# EAGLE board xv11_lidar_controller (EAGLE 6.2)
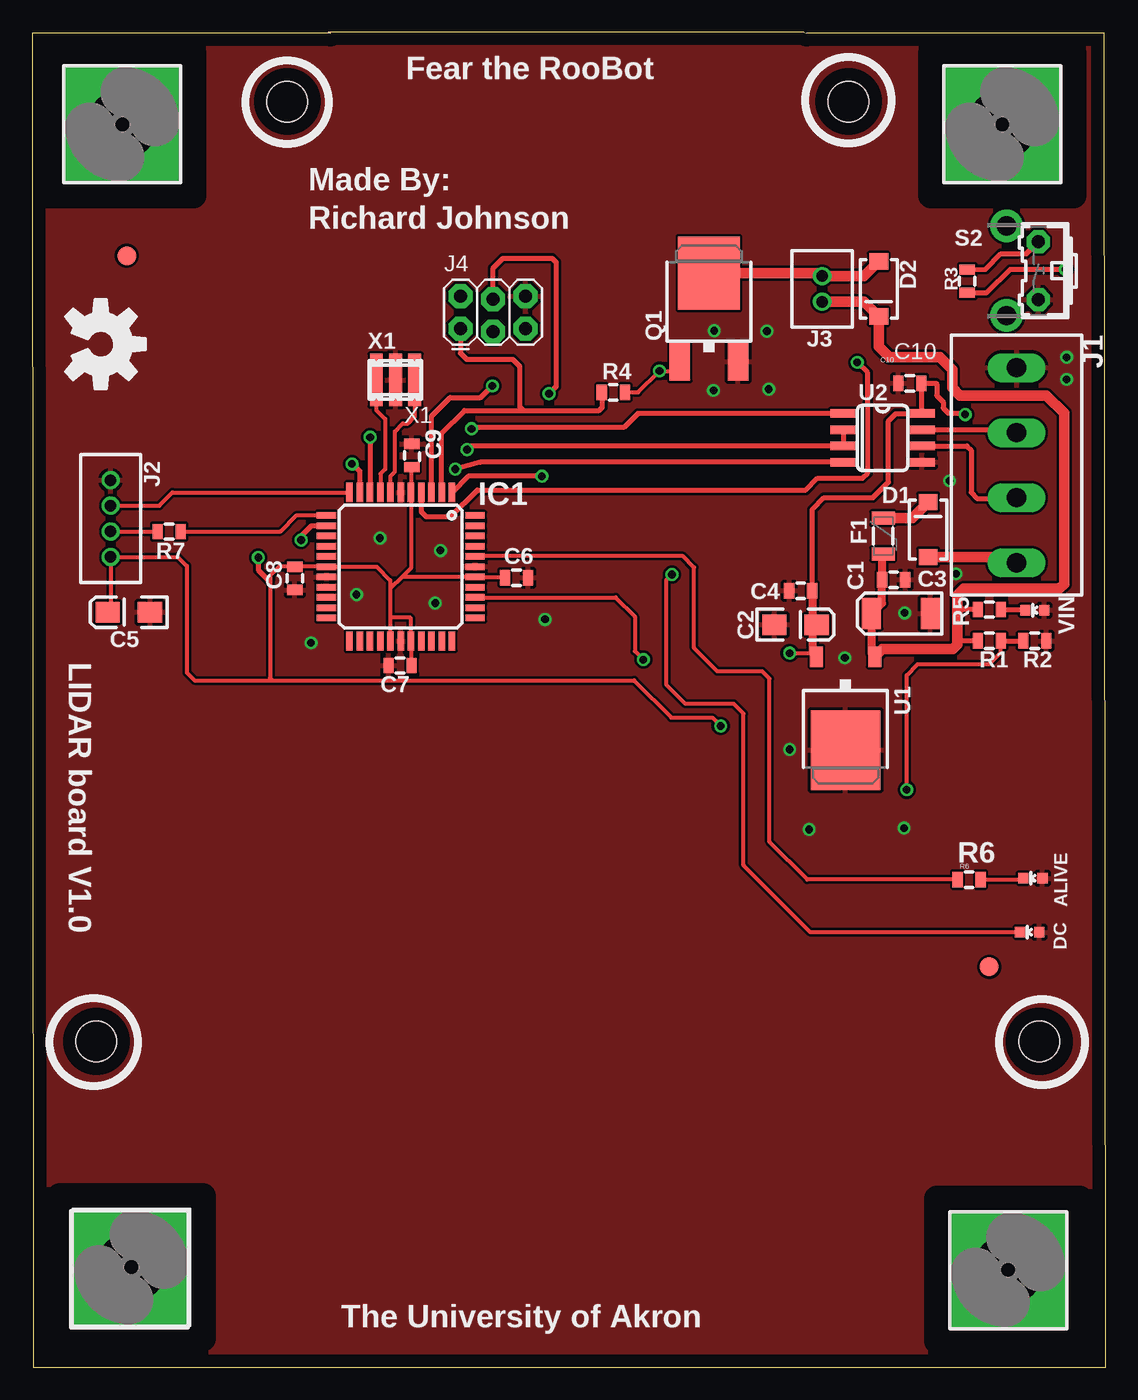
[diagram p0: board, top side]
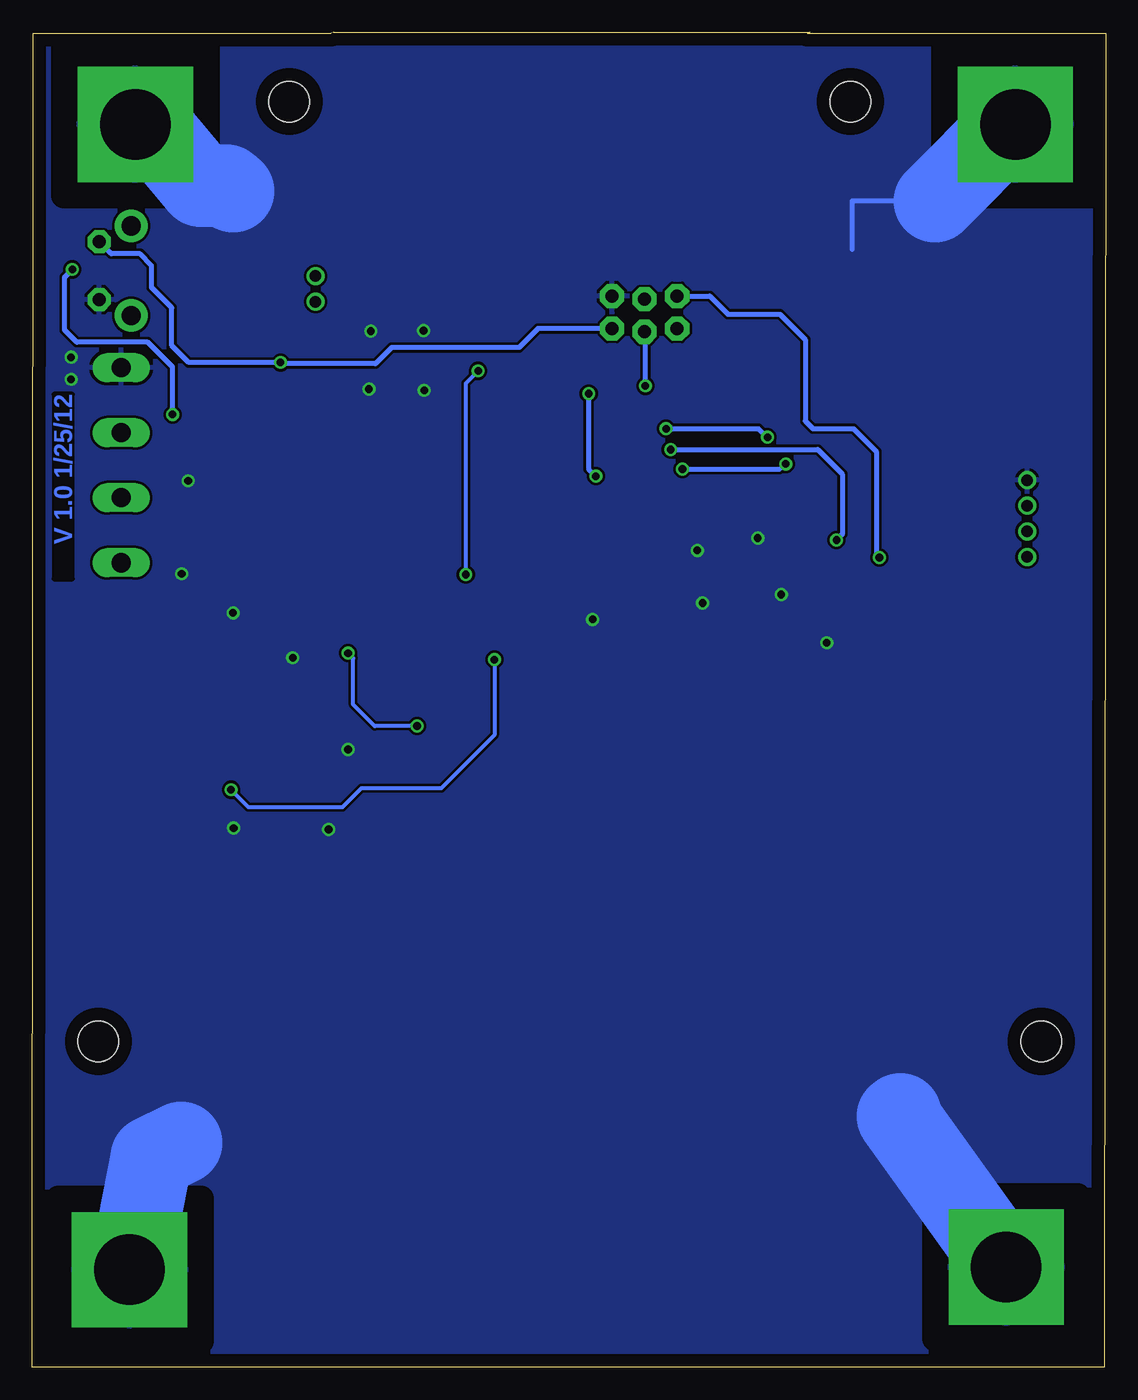
[diagram p1: board, bottom side, seen from below]

Size 83.87 x 104.31 mm. Coordinates in mm from the lower left corner, seen from the top.
Outline: 0.1,0 83.87,0 83.76,104.2 60.5,104.2 60.29,104.31 23.11,104.31 23.31,104.2 0,104.2 0.1,0
Copper layers (1+16): Top 0.035mm / dielectric 1.5mm / Bottom 0.035mm
Design rules: minimum track width 8mil, minimum drill 15mil, track to track 8mil, track to pad 8mil, pad to pad 8mil, via to via 8mil, smd to smd 8mil, copper to edge 40mil, drill to drill 8mil, minimum pad ring 10mil, minimum via ring 8mil, stop-mask expansion 4mil, vias tented up to drill 0mil, thermal gap 10mil
Holes 3.17 mm at 5.02,25.46 78.68,25.46 19.94,98.87 63.77,98.87

## Footprints (pad centres in the part's own frame; a part is rotated, then mirrored left to right if it is on the bottom)
EIA6032 = smd 1.5 x 2.4: P$1 -2.3,0; P$2 2.3,0
EIA3216-KIT = smd 1.9 x 1.6: A 1.65,0; C -1.65,0
0805 = smd 0.8 x 1.2: 1 -0.9,0; 2 0.9,0
SMA-DIODE = smd 1.27 x 1.47: A -2.15,0; C 2.15,0
PTC-1206 = smd 1 x 1.8: 1 -1.4,0; 2 1.4,0
5,5-PAD-SQUARE = drill 5.5 pad 9 square: B5,5 0,0
TQFP44 = smd 1.5 x 0.5: 1 -5.8,4; 2 -5.8,3.2; 3 -5.8,2.4; 4 -5.8,1.6; 5 -5.8,0.8; 6 -5.8,0; 7 -5.8,-0.8; 8 -5.8,-1.6; 9 -5.8,-2.4; 10 -5.8,-3.2; 11 -5.8,-4; 23 5.8,-4; 24 5.8,-3.2; 25 5.8,-2.4; 26 5.8,-1.6; 27 5.8,-0.8; 28 5.8,0; 29 5.8,0.8; 30 5.8,1.6; 31 5.8,2.4; 32 5.8,3.2; 33 5.8,4 | smd 0.5 x 1.5: 12 -4,-5.8; 13 -3.2,-5.8; 14 -2.4,-5.8; 15 -1.6,-5.8; 16 -0.8,-5.8; 17 0,-5.8; 18 0.8,-5.8; 19 1.6,-5.8; 20 2.4,-5.8; 21 3.2,-5.8; 22 4,-5.8; 34 4,5.8; 35 3.2,5.8; 36 2.4,5.8; 37 1.6,5.8; 38 0.8,5.8; 39 0,5.8; 40 -0.8,5.8; 41 -1.6,5.8; 42 -2.4,5.8; 43 -3.2,5.8; 44 -4,5.8
M4 = drill 1.5 long: P$1 0,0; P$2 5.08,0; P$3 10.16,0; P$4 15.24,0
2MM4POS = drill 0.9: 1 3,0; 2 1,0; 3 -1,0; 4 -3,0
2MM2POS = drill 0.9: P$1 -1,0; P$2 1,0
2X3_LOCK = drill 1.016 pad 1.88 octagon: 1 0,0; 2 0,2.54; 3 2.54,-0.254; 4 2.54,2.286; 5 5.08,0; 6 5.08,2.54
FIDUCIAL-1.5X3 = smd 1.5 x 1.5: 1 0,0
LED-0603 = smd 0.8 x 0.8: A 0,-0.75; C 0,0.75
DPAK = smd 1.6 x 3: 1 -2.28,-5.31; 3 2.28,-5.31 | smd 4.826 x 5.715: 4 0,1.588
B3F-31XX = drill 1.016 pad 1.778 octagon: 1 -2.261,-1.245; 2 2.261,-1.245 | drill 1.499 pad 2.54: 3 -3.505,1.245; 4 3.505,1.245
TO252 = smd 1 x 1.6: 1 -2.28,-4.8; 2 2.28,-4.8 | smd 5.4 x 6.2: 3 0,2.5
SO08 = smd 0.66 x 2.032: 1 -1.905,-3.073; 2 -0.635,-3.073; 3 0.635,-3.073; 4 1.905,-3.073; 5 1.905,3.073; 6 0.635,3.073; 7 -0.635,3.073; 8 -1.905,3.073
AWCSR = smd 1 x 4.1: 1 -1.5,0; 2 0,0; 3 1.5,0

## Placement (x,y rotation side)
C1  10uF  [EIA6032]  67.86,58.89 0 top
C2  10uF  [EIA3216-KIT]  59.63,58.03 0 top
C3  .1uF  [0805]  67.31,61.53 0 top
C4  .1uF  [0805]  60.04,60.67 180 top
C5  10uF  [EIA3216-KIT]  7.56,58.99 180 top
C6  .1uF  [0805]  37.84,61.68 0 top
C7  .1uF  [0805]  28.75,54.83 180 top
C8  .1uF  [0805]  20.52,61.63 270 top
C9  .1uF  [0805]  29.66,71.23 90 top
C10  .1uF  [0805]  68.58,76.87 180 top
D1  [SMA-DIODE]  70,65.44 90 top
D2  [SMA-DIODE]  66.14,84.24 270 top
F1  PTCSMD  [PTC-1206]  66.49,64.94 270 top
H1  [5,5-PAD-SQUARE]  7.06,97.09 0 top
H2  [5,5-PAD-SQUARE]  75.79,97.09 0 top
H3  [5,5-PAD-SQUARE]  7.77,7.84 0 top
H4  [5,5-PAD-SQUARE]  76.25,7.63 0 top
IC1  ATMEGA644A  [TQFP44]  28.8,62.55 270 top
J1  EUROMAG-4  [M4]  76.91,78.09 270 top
J2  LIDAR4POS  [2MM4POS]  6.14,66.31 270 top
J3  LIDAR2POS  [2MM2POS]  61.72,84.24 90 top
J4  AVR_SPI_PRG_62X3_LOCK  [2X3_LOCK]  33.47,81.14 0 top
JP1  FIDUCIAL1.5X3  [FIDUCIAL-1.5X3]  7.41,86.83 0 top
JP2  FIDUCIAL1.5X3  [FIDUCIAL-1.5X3]  74.77,31.31 0 top
LED1  VIN  [LED-0603]  78.33,59.14 90 top
LED2  ALIVE  [LED-0603]  78.18,38.21 90 top
LED3  DC  [LED-0603]  77.92,34 90 top
Q1  MOSFET-NCHANNELFDD8580  [DPAK]  52.88,83.88 0 top
R1  [0805]  74.77,56.76 180 top
R2  [0805]  78.33,56.76 180 top
R3  10k  [0805]  73.05,84.85 270 top
R4  1k  [0805]  45.41,76.16 180 top
R5  1k  [0805]  74.77,59.19 180 top
R6  1k  [0805]  73.2,38.11 0 top
R7  1k  [0805]  10.71,65.29 180 top
S2  [B3F-31XX]  77.36,85.66 90 top
U1  7805DT  [TO252]  63.55,50.71 180 top
U2  MAX485SO  [SO08]  66.44,72.61 270 top
U$2  OSHW-LOGOL  [OSHW-LOGO-L]  5.38,79.92 270 top
X1  [AWCSR]  28.39,77.13 180 top

## Library data of the parts
C1-C10 D1 D2 F1 J4 JP1 JP2 LED1-LED3 Q1 R1-R7 U$2 = SparkFun
H1-H4 = holes
IC1 = atmel; MPN: ATMEGA644PV-10AU; OC_FARNELL: 1455123; OC_NEWARK: 58M3748
J1-J3 U2 = NASA_LIB
S2 U1 X1 = adafruit

## Nets
5V: C2.A C4.1 C5.A C6.1 C7.1 C8.1 C9.1 C10.1 IC1.5 IC1.17 IC1.27 IC1.29 IC1.38 J2.1 J4.2 R3.2 U1.2 U2.8
ADCVIN: IC1.36 R1.1 R2.2
GND: C1.P$2 C2.C C3.2 C4.2 C5.C C6.2 C7.2 C8.2 C9.2 C10.2 H1.B5,5 H2.B5,5 H3.B5,5 H4.B5,5 IC1.6 IC1.18 IC1.28 IC1.39 J1.P$1 J2.4 J4.6 LED1.A LED2.A LED3.A Q1.3 R2.1 S2.1 U1.3 U2.5 X1.2
LRX: J2.2 R7.2
LTX: IC1.11 J2.3
MISO: IC1.2 J4.1 R4.2
MOSI: IC1.1 J4.4
N$1: D1.A J1.P$4
N$2: D1.C F1.1
N$5: LED3.C Q1.1 R4.1
N$6: LED1.C R5.1
N$7: IC1.40 R6.1
N$8: LED2.C R6.2
N$10: D2.A J3.P$2 Q1.4
N$11: IC1.13 U2.2 U2.3
N$12: IC1.12 R7.1
N$13: IC1.7 X1.1
N$14: IC1.8 X1.3
RS485+: J1.P$3 U2.6
RS485-: J1.P$2 U2.7
RST: IC1.4 J4.5 R3.1 S2.2
RXD: IC1.9 U2.1
SCK: IC1.3 J4.3
TXD: IC1.10 U2.4
VIN: C1.P$1 C3.1 D2.C F1.2 J3.P$1 R1.2 R5.2 U1.1

## Tracks (layer width: path | path; a pad name or v marks a point on that pad's centre or on a via)
5V  (via drill 0.6)
  Top 0.305: C5.A 6.14,59.22 J2.1 11.38,63.31 12.09,62.6 12.09,54.27 12.7,53.66 18.79,53.66 | 27.99,60.82 27.99,61.48 26.92,62.55 IC1.17 20.57,62.55 | 27.99,60.82 27.99,58.48 | 27.99,58.48 27.99,56.76 IC1.27 | 27.99,58.48 28.09,58.59 29.51,58.59 29.6,58.5 IC1.29 29.6,54.85 C7.1 | 28.91,61.75 IC1.38 36.66,61.75 36.77,61.63 | 28.91,61.75 27.99,60.82 | 28.91,61.75 29.6,62.43 IC1.5 29.61,69.91 C9.1 | C8.1 20.55,62.53 20.57,62.55 | 18.79,53.66 47.04,53.66 49.93,50.76 53.13,50.76 v53.79,50.1 | v59.18,55.79 60.99,55.79 U1.2 | 20.57,62.55 19.3,62.55 18.59,61.84 18.59,61.53 18.59,53.86 18.79,53.66 | 36.83,61.58 36.77,61.58 C6.1 36.77,61.63 | 36.83,61.58 36.93,61.48 | 36.83,61.58 36.77,61.63
  Top 0.406: C4.1 60.94,67 61.87,67.93 65.68,67.93 66.9,69.15 66.9,73.93 67.46,74.49 69.49,74.49 U2.8 69.48,74.55 C10.1 70.61,76.87 70.66,76.82 70.66,75.91 71.17,75.4 71.17,74.94 71.57,74.54 72.79,74.54 v72.89,74.43 | v80.72,85.76 76.4,85.76 74.58,83.95 R3.2 | v17.67,63.26 17.67,62.29 18.54,61.43 18.54,61.48 18.59,61.53
  Top 0.61: 60.99,55.79 60.99,57.73 C2.A 60.94,58.37 C4.1
  Bottom 0.305: v53.79,50.1 57.09,50.1 58.77,51.78 58.77,55.38 v59.18,55.79
  Bottom 0.406: v72.89,74.43 72.89,78.14 74.82,80.07 80.36,80.07 81.33,81.04 81.33,85.15 v80.72,85.76 | J4.2 30.93,83.68 29.51,82.26 25.45,82.26 23.46,80.28 23.46,73.93 22.86,73.32 19.71,73.32 17.93,71.54 17.93,63.51 v17.67,63.26
ADCVIN  (via drill 0.6)
  Top 0.305: IC1.36 45.58,60.15 47.09,58.64 47.09,55.94 v47.75,55.28 | v68.32,45.12 68.32,54.06 69.18,54.93 74.77,54.93 75.69,55.84 75.69,56.74 R1.1
  Top 0.406: R1.1 R2.2
  Bottom 0.305: v47.75,55.28 47.75,49.39 51.91,45.22 58.16,45.22 59.63,43.75 66.95,43.75 v68.32,45.12
GND  (via drill 0.6)
  Bottom 0.406: 13.36,91.1 19.81,91.1 19.81,87.34
  Bottom 6.452: H3.B5,5 16.25,19.62 16.05,19.77 | H1.B5,5 7.36,97.09 13.36,91.1 | H4.B5,5 74.52,16.42 72.23,17.54 | H2.B5,5 74.72,97.09 70.71,92.32 68.68,92.32 68.17,91.86
  other vias: 21.79,56.6 40.08,58.43 25.34,60.36 31.49,59.7 31.9,63.82 27.17,64.78 53.28,80.99 53.23,76.31 57.55,76.42 57.4,80.94 80.82,78.91 80.82,77.18 60.7,42.02 59.18,48.27 63.49,55.44 68.12,42.13 72.18,61.99 68.17,58.94 71.67,69.25
  pour Bottom: -0.01,104.15 83.76,104.15 83.87,0.27 0.1,0.27
  pour Top: -0.01,104.2 83.76,104.2 83.97,-0.14 0.2,-0.14
LRX
  Top 0.305: J2.2 9.8,65.31 R7.2
LTX
  Top 0.305: J2.3 9.94,67.31 10.97,68.34 24.79,68.34 IC1.11
MISO
  Top 0.305: R4.2 44.51,76.1 44.55,76.06
  Top 0.406: IC1.2 32,72.96 33.78,74.74 38.4,74.74 | 38.4,74.74 44.29,74.74 44.55,74.99 44.55,76.06 | J4.1 33.47,79.21 33.93,78.75 37.54,78.75 38.1,78.19 38.1,75.04 38.4,74.74
MOSI  (via drill 0.6)
  Top 0.406: J4.4 36.01,85.86 36.77,86.63 40.64,86.63 40.94,86.32 40.94,76.62 v40.38,76.06 | v39.82,69.61 34.06,69.61 IC1.1
  Bottom 0.406: v40.38,76.06 40.38,70.17 v39.82,69.61
N$1
  Top 0.813: D1.A 76.47,63.29 J1.P$4
N$2
  Top 0.813: F1.1 68.76,66.34 70,67.58 D1.C
N$5  (via drill 0.6)
  Top 0.305: LED3.C 60.8,34 55.57,39.23 55.57,51.07 54.81,51.83 51.05,51.83 49.58,53.3 49.58,61.53 v49.98,61.94 | Q1.1 49.86,77.84 v49.02,77.84 47.34,76.16 R4.1
  Bottom 0.305: v49.98,61.94 49.98,76.87 v49.02,77.84
N$6
  Top 0.406: R5.1 77.53,59.19 LED1.C
N$7
  Top 0.305: R6.1 60.55,38.11 57.6,41.06 57.6,53.81 57.04,54.37 53.54,54.37 51.71,56.2 51.71,62.5 50.85,63.36 34.59,63.36 IC1.40
N$8
  Top 0.305: R6.2 77.32,38.11 LED2.C
N$10
  Top 0.813: Q1.4 61.48,85.47 J3.P$2 64.99,85.24 D2.A
N$11  (via drill 0.6)
  Top 0.406: U2.2 U2.3 34.26,71.97 v33.98,71.69 | v21.03,64.63 21.03,64.94 21.84,65.75 IC1.13 | IC1.13
  Bottom 0.406: v33.98,71.69 22.5,71.69 20.57,69.76 20.57,65.09 v21.03,64.63
N$12
  Top 0.305: R7.1 19.4,65.29 20.67,66.56 22.99,66.56 IC1.12
N$13
  Top 0.305: X1.1 29.89,74.26 29.36,73.72 28.95,73.72 28.34,73.11 28.34,69.96 28,69.62 IC1.7
N$14
  Top 0.305: X1.3 26.89,74.77 27.58,74.08 27.58,70.17 27.22,69.81 27.22,68.39 | IC1.8 27.2,68.36 27.22,68.39 | 27.22,68.29 27.22,68.34 27.22,68.39
RS485+
  Top 0.406: U2.6 73.02,71.97 73.35,71.64 73.35,68.34 73.81,67.88 76.86,67.88 J1.P$3
RS485-
  Top 0.406: U2.7 76.68,73.24 J1.P$2
RST  (via drill 0.6)
  Top 0.406: IC1.4 30.4,66.84 30.78,66.46 32.71,66.46 34.79,68.54 60.45,68.54 61.36,69.46 64.87,69.46 65.27,69.86 65.27,77.69 v64.46,78.5 | R3.1 74.48,85.78 75.69,86.98 77.67,86.98 S2.2
  Bottom 0.406: S2.2 77.67,86.98 75.43,86.98 74.52,86.07 74.52,84.34 72.94,82.77 72.94,79.82 71.62,78.5 v64.46,78.5 64.46,78.45 64.41,78.4 57.04,78.4 55.77,79.67 45.82,79.67 44.34,81.14 J4.5
RXD  (via drill 0.6)
  Top 0.406: U2.1 47.32,74.51 46.22,73.42 34.44,73.42 v34.34,73.32 | v26.41,72.66 26.41,68.36 IC1.9
  Bottom 0.406: v34.34,73.32 27.12,73.32 v26.41,72.66
SCK  (via drill 0.6)
  Top 0.406: IC1.3 31.2,74.29 32.66,75.76 35.05,75.76 v35.96,76.67
  Bottom 0.406: v35.96,76.67 35.96,80.94 J4.3
TXD  (via drill 0.6)
  Top 0.406: U2.4 35.02,70.7 v33.07,70.17 | v24.99,70.57 25.04,70.57 25.6,70.02 IC1.10 | IC1.10
  Bottom 0.406: v33.07,70.17 25.5,70.17 v24.99,70.57
VIN
  Top 0.305: C3.1 66.41,61.5 66.39,61.48
  Top 0.406: R5.2 72.69,59.19 72.28,59.6 | R1.2 72.49,56.76 72.28,56.96
  Top 0.61: C3.1 66.41,63.45 F1.2 | 66.44,61.53 66.39,61.48 66.39,59.7 C1.P$1 65.56,55.77 U1.1
  Top 0.813: J3.P$1 64.99,83.24 D2.C 66.14,79.72 66.95,78.91 70.91,78.91 71.88,77.94 71.88,76.52 72.49,75.91 79.24,75.91 80.61,74.54 80.61,61.18 80.26,60.82 72.79,60.82 72.28,60.31 72.28,59.6 72.28,56.96 72.28,56.45 71.93,56.1 66.41,56.1 U1.1

## Text on the board
Bottom: V 1.0 1/25/12
_tsilk: Fear the RooBot | Made By: | Richard Johnson | S2 | D2 | R3 | X1 | J3 | J1 | Q1 | C10 | R4 | U2 | J2 | C9 | D1 | IC1 | F1 | R7 | C6 | C3 | C8 | C4 | C1 | R5 | C5 | C2 | VIN | R1 | R2 | LIDAR board V1.0 | C7 | U1 | ALIVE | R6 | DC | The University of Akron